# Altium PCB node_pcb.PcbDoc
Units mm, origin at the board's own origin, x right, y up, seen from the top; angles counter-clockwise.
Board outline 40 x 90.26 mm, 2 copper layers (Top Layer, Bottom Layer); 50 components, 52 nets, 195 pads, 49 vias.
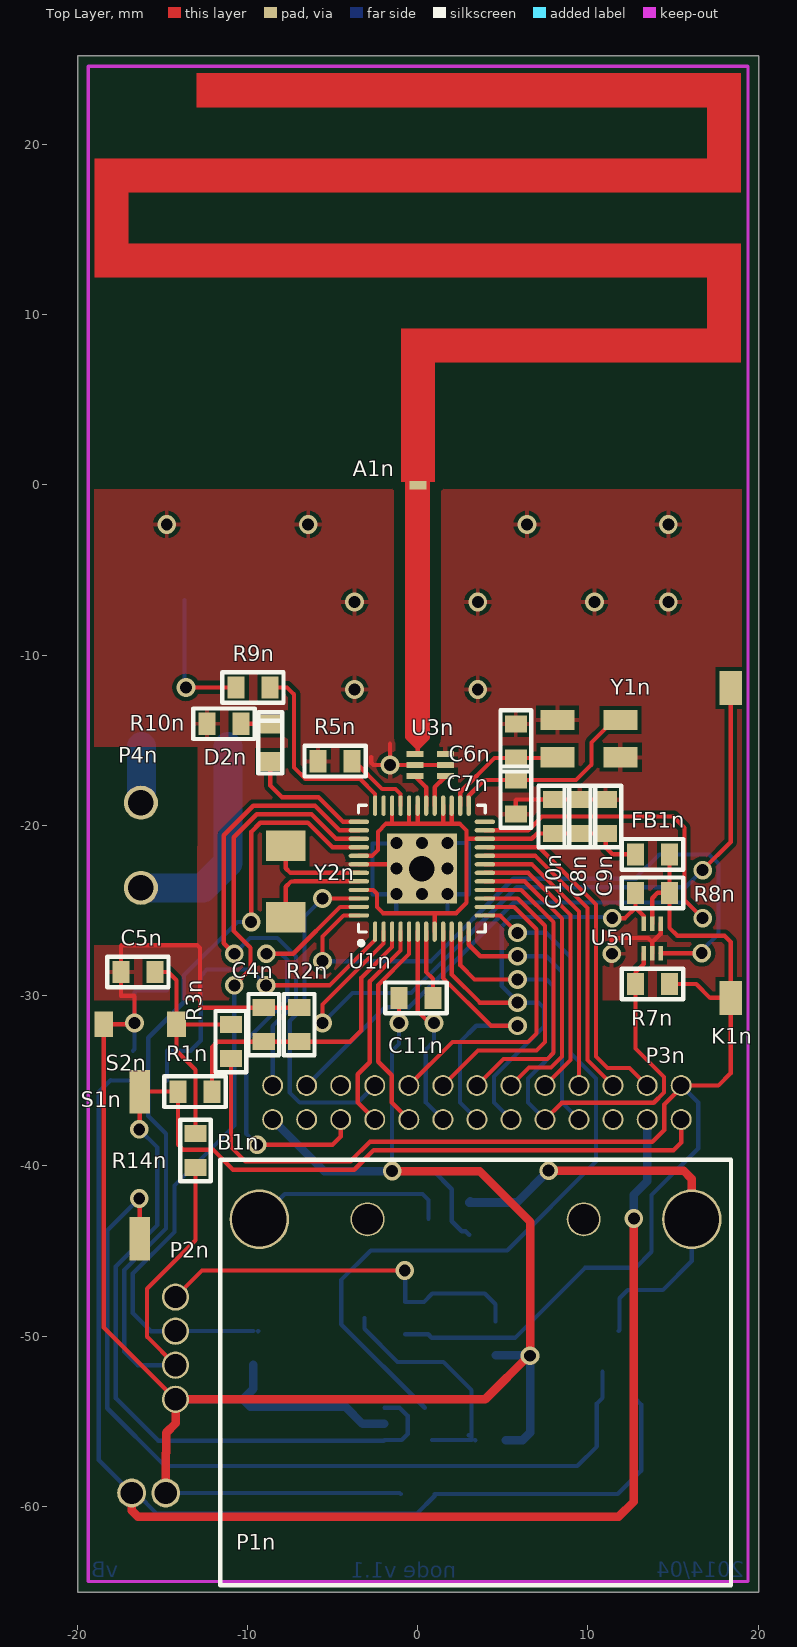
[diagram p0: Top Layer view]
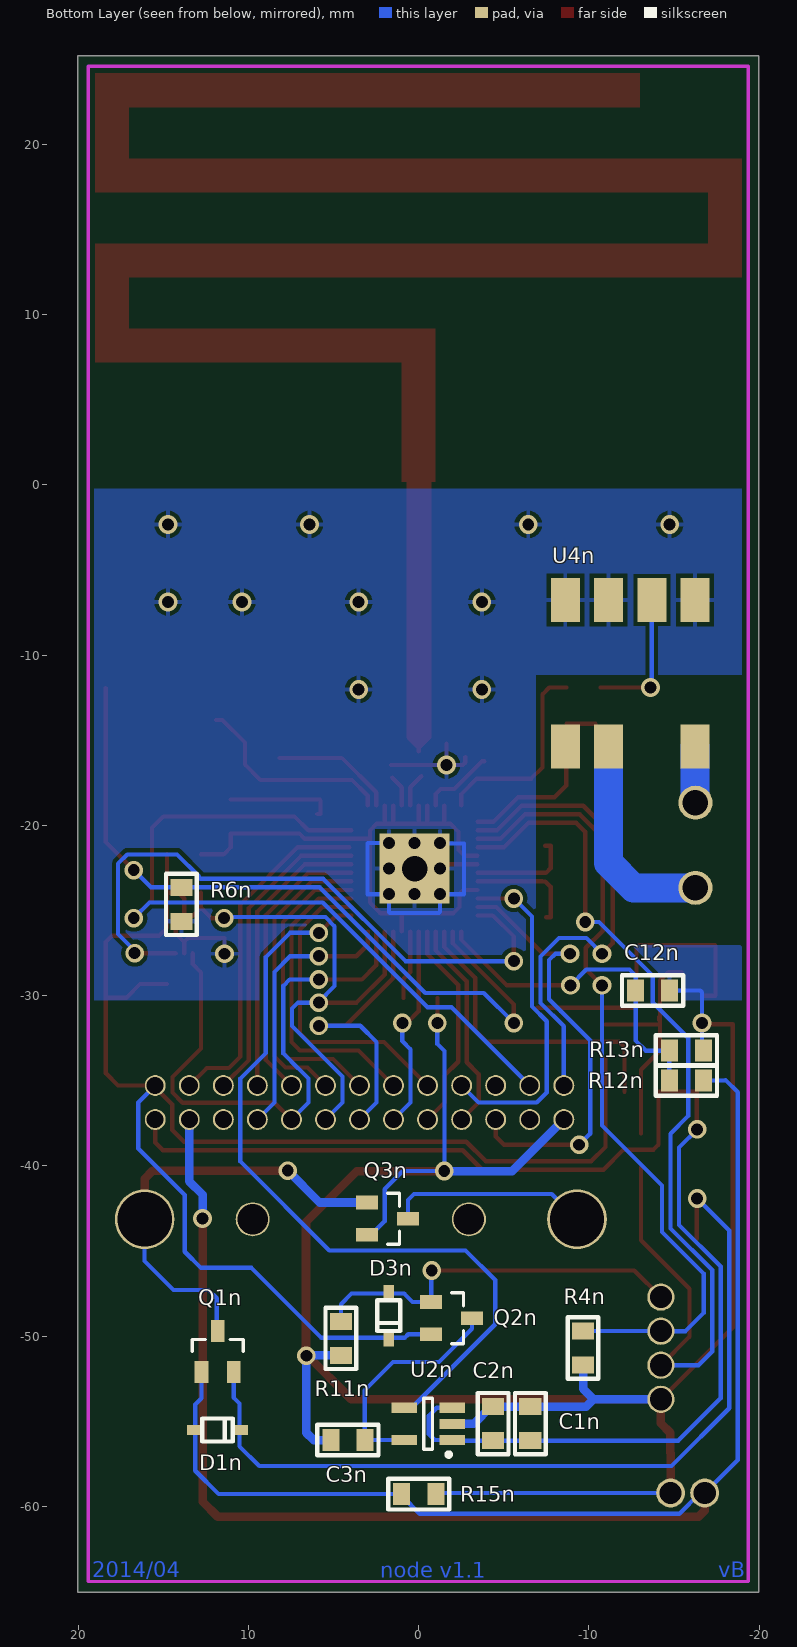
[diagram p1: Bottom Layer view, seen from below]
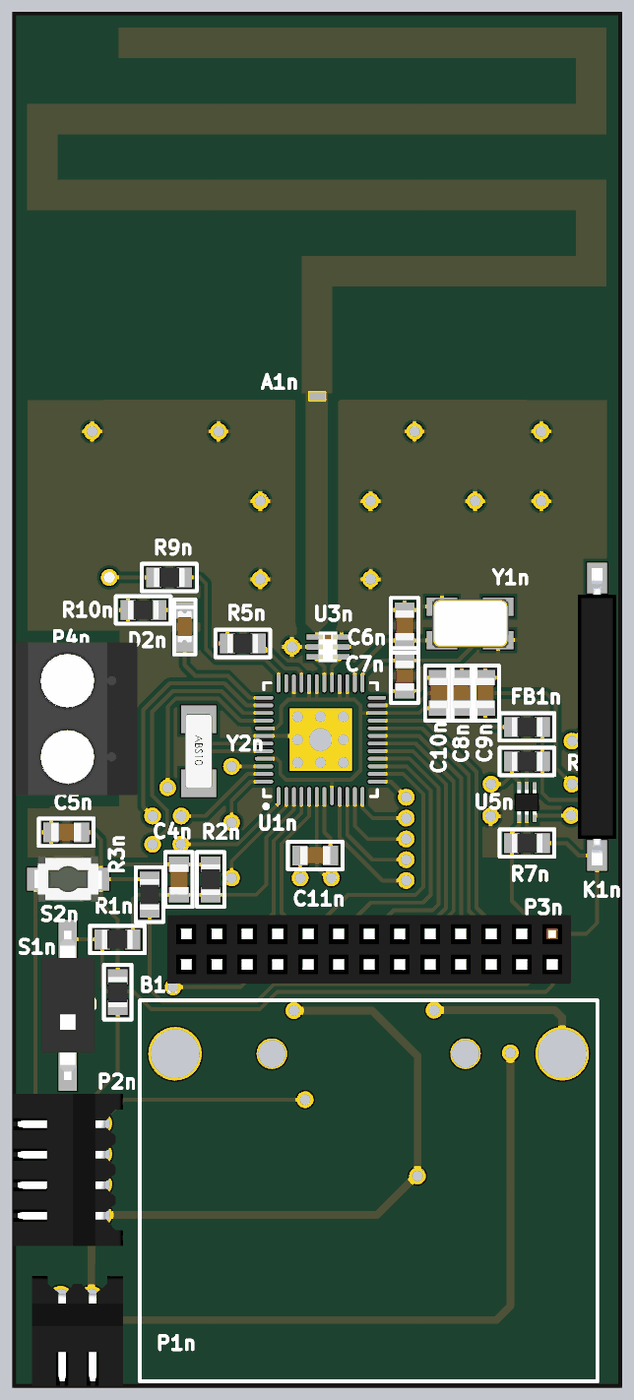
[diagram p2: 3D render of the assembled board from above, using the file's embedded part models]
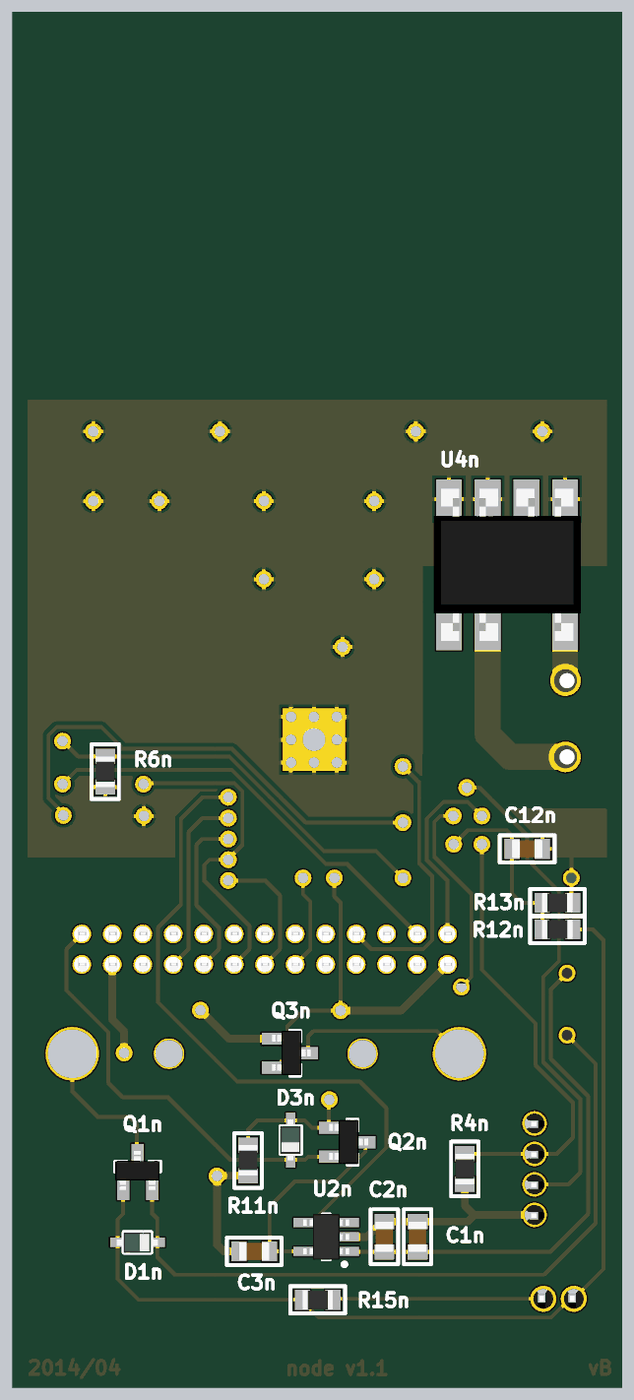
[diagram p3: 3D render of the assembled board from below, using the file's embedded part models]

## Layer stack, top to bottom
Top Layer: signal copper 0.0356
Dielectric: dielectric 0.32, FR-4, Dk 4.8
Bottom Layer: signal copper 0.0356

## Board outline
-19.971,-65.052 20.034,-65.052 20.034,25.212 -19.971,25.212

## Design rules (kind name [scope] priority, off if disabled: settings)
Clearance Clearance_RF_CC430 [Inpoly vs InNet('NetA1n_1')] p1: gap=0.65
Clearance Clearance_1 [All] p2: gap=0.25
Clearance Clearance_polygon [Inpoly] p3: gap=0.5
HoleSize [All] p1: absolutevalues=TRUE maxlimit=10 minlimit=0.7 maxpercent=80.000 minpercent=20.000
MinimumSolderMaskSliver [All] p1 off: minsoldermaskwidth=0.05
PolygonConnect [All] p1: connectstyle=Relief reliefconductorwidth=0.254 reliefentries=4 polygonreliefangle="90 Angle"
RoutingVias [All] p1: holewidth=0.7 width=1.1 viastyle="Through Hole" minholewidth=0.7 minwidth=1.1 maxholewidth=8 maxwidth=10
SilkToSilkClearance [All] p1 off: silktosilkclearance=0.254
SilkscreenOverComponentPads [All] p1 off: minsilkscreentomaskgap=0.254
SolderMaskExpansion [All] p1: expansion=0.102
Width [All] p1: maxlimit=2 minlimit=0.25 preferedwidth=0.25
24 further rules are at their usual default settings.

## Classes and differential pairs
component class node_sch: B1n C1n C2n C3n C4n C5n C6n C7n C8n C9n C10n C11n C12n D1n D2n D3n FB1n K1n P1n P2n P3n P4n Q1n Q2n Q3n R1n R2n R3n R4n R5n R6n R7n R8n R9n R10n R11n R12n R13n R14n R15n S1n S2n U1n U4n U5n Y1n Y2n

## Components (designator, comment, footprint, x,y, rotation, side; value= is the part's Value field where it differs from the comment)
A1n "PCB Antenna" TI_Monopole_PCB_Antenna 0.022,-0.011 r0 top
B1n "Coin Cell" COIN_CELL_HOLDER_JBH24 3.404,-43.14 r180 top
C1n "NA" 0805_CAP -6.553,-55.143 r270 bottom
C2n "1uF" 0805_CAP -4.369,-55.143 r270 bottom
C3n "1uF" 0805_CAP 4.166,-56.109 r180 bottom
C4n "100nF" 0805_CAP -9.042,-31.71 r270 top
C5n "2.2nF" 0805_CAP -16.434,-28.611 r0 top
C6n "10pF" 0805_CAP 5.766,-18.339 r90 top
C7n "10pF" 0805_CAP 5.766,-15.037 r270 top
C8n "2.2pF" 0805_CAP 9.525,-19.482 r270 top
C9n "100nF" 0805_CAP 11.049,-19.482 r90 top
C10n "1uF" 0805_CAP 8.001,-19.482 r270 top
C11n "470nF" 0805_CAP -0.102,-30.135 r0 top
C12n "100nF" 0805_CAP -13.741,-29.703 r0 bottom
D1n "Schottky" SOD323-F 12.725,-54.839 r270 bottom
D2n "LED" 0805_LED_RED -8.661,-15.149 r90 top
D3n "Schottky" SOD323-F 1.092,-47.904 r0 bottom
FB1n "FerriteBead" 0805_RES 13.792,-21.702 r180 top
K1n "Reed sensor" REED_SENSOR_SMD 18.39,-21.034 r90 top
P1n "External Battery" DF3A-2P-2DS -15.799,-59.218 r0 top
P2n "SBW interface" DF3A-4P-2DS -14.224,-47.712 r270 top
P3n "Node-header" FH26p2pitch_thru-hole 3.48,-36.283 r180 top
P4n "CTB5202/2" ScrewTerminal2p5pitch_thru-hole -16.256,-21.169 r270 top
Q1n "P-MOS" SOT23 11.811,-50.902 r90 bottom
Q2n "P-MOS" SOT23 -1.93,-48.946 r180 bottom
Q3n "N-MOS" SOT23 1.829,-43.104 r180 bottom
R1n "6K2" 0805_RES -13.081,-35.647 r180 top
R2n "3K6" 0805_RES -6.96,-31.71 r270 top
R3n "33K" 0805_RES -10.973,-32.7 r270 top
R4n "33K" 0805_RES -9.652,-50.698 r90 bottom
R5n "56K (1%)" 0805_RES -4.851,-16.231 r180 top
R6n "10K" 0805_RES 13.945,-24.638 r90 bottom
R7n "1K" 0805_RES 13.792,-29.322 r0 top
R8n "1K" 0805_RES 13.792,-23.963 r0 top
R9n "100R" 0805_RES -9.677,-11.898 r180 top
R10n "1R50" 0805_RES -11.379,-14.031 r0 top
R11n "10K" 0805_RES 4.572,-50.14 r90 bottom
R12n "6K2" 0805_RES -15.723,-34.986 r180 bottom
R13n "2K7" 0805_RES -15.723,-33.234 r0 bottom
R14n "330R" 0805_RES -13.056,-39.101 r90 top
R15n "10K" 0805_RES 0,-59.284 r180 bottom
S1n "SW DIP-1" SW_DIP(1way) -16.332,-39.965 r180 top
S2n "SW TACT" SW-TACT -16.307,-31.684 r180 top
U1n "CC430F5137" TI-RGZ48-4100X4100TP_N 0.247,-22.54 r90 top
U2n "TPS780330220" SOT5 -1.956,-56.109 r0 bottom
U3n "0868BM15C0001" JT_Balun 0.737,-16.453 r90 top
U4n "PR39MF51" SSR_SMT_LEAD -16.231,-6.767 r270 bottom
U5n "TMP112" SOT563 13.279,-27.519 r90 top
Y1n "XTAL_RF" xtal_rf 10.058,-14.91 r180 top
Y2n "XTAL" XTAL -7.747,-23.302 r270 top

## Footprints (in the part's own frame and the unit in brackets; to place one, negate y for a bottom-side part, rotate by r counter-clockwise, add the part's x,y. Pads: shape width x height; smd on the part's side, far side on the other; paste and mask are expansions set on the pad)
0805_CAP [mm] "0805_Cap"
  rect 1x1.3 smd: 1(-1,0) 2(1,0)
  silkscreen extent -1.8,-0.9 1.8,0.9, body extent -1,-0.6 1,0.6, height 1.2
0805_LED_RED [mm] "0805 Red LED"
  rect 1.1x1.3 smd: 1(-1.1,0) 2(1.1,0)
  silkscreen extent -1.8,-0.7 1.8,0.7, body extent -1.01,-0.45 1.06,0.46, height 0.85
0805_RES [mm] "0805_Res"
  rect 1x1.3 smd: 1(-1,0) 2(1,0)
  silkscreen extent -1.8,-0.9 1.8,0.9, body extent -1,-0.62 1,0.63, height 0.5
COIN_CELL_HOLDER_JBH24 [mm] "Based on JBH24 Jauch coin cell holder"
  round 3.5 hole 3.2: 1(-12.7,0) 2(12.7,0)
  round 2 hole 1.8: 3(6.35,0) 4(-6.35,0)
  silkscreen extent -15,-3.5 15,21.5
DF3A-2P-2DS [mm] "For power source connection. (DF3A- 2P-2DS)"
  round 1.7 hole 1.3: 1(-1,0) 2(1,0)
  body extent -2.9,-5.7 3.1,1.5, height 4.9
DF3A-4P-2DS [mm] "Based on Hirose DF3A-4P-2DS model."
  round 1.6 hole 1.3: 1(0,0) 2(2,0) 3(4,0) 4(6,0)
  body extent -1.96,-5.68 8.04,1.52, height 5.05
FH26p2pitch_thru-hole [mm] "Node Header; 13x2 Position, 2mm pitch, through-hole"
  round 1.23 hole 1: 1(-12,-1) 2(-12,1) 3(-10,-1) 4(-10,1) 5(-8,-1) 6(-8,1) 7(-6,-1) 8(-6,1) 9(-4,-1) 10(-4,1) 11(-2,-1) 12(-2,1) 13(0,-1) 14(0,1) 15(2,-1) 16(2,1) 17(4,-1) 18(4,1) 19(6,-1) 20(6,1) 21(8,-1) 22(8,1) 23(10,-1) 24(10,1) 25(12,-1) 26(12,1)
  body extent -13.21,-2.24 13.29,2.26, height 4
JT_Balun [mm] "footprint of 0868BM15C0001"
  rect 0.35x1 smd: 1(0.65,0.9) 2(0,0.9) 3(-0.65,0.9) 4(-0.65,-0.9) 5(0,-0.9) 6(0.65,-0.9)
  body extent -1,-0.62 1,0.63, height 0.8
REED_SENSOR_SMD [mm] "Based on MK15-B-2-OE"
  rect 2x1.3 smd: 1(-9.1,0) 2(9.1,0)
  body extent -9.75,-1.25 9.75,1.25, height 2.55
ScrewTerminal2p5pitch_thru-hole [mm] "Based on Camdenboss CTB5202/2 screw terminal model"
  round 2 hole 1.5: 1(-2.5,0) 2(2.5,0)
  body extent -5,-3.5 5,4.5, height 10
SOD323-F [mm] "SOD323-F (SC-90)"
  rect 0.6x1 smd: 1(0.675,2.2) 2(0.675,-0.4)
  silkscreen extent 0,0 1.35,1.8, body extent 0.02,-0.46 1.37,2.24, height 0.79
SOT5 [mm]
  rect 1.5x0.6 smd: 1(0,0) 2(0,-0.95) 3(0,-1.9) 4(2.8,-1.9) 5(2.8,0)
  silkscreen extent 0.08,-2.45 1.65,0.97, body extent -0.1,-2.45 2.9,0.55, height 1.45
SOT23 [mm]
  rect 1.3x0.8 smd: 1(-1.2,0.95) 2(-1.2,-0.95) 3(1.2,0)
  silkscreen extent 0,-1.5 0.7,1.5, body extent -1.17,-1.44 1.38,1.48, height 0.94
SOT563 [mm] "PCB footprint of the SOT563 package. Designed in Sub1GHz_WSN project for tmp112"
  rect 0.85x0.25 smd mask+0.05: 1(0,0) 2(0,-0.5) 3(0,-1) 4(1.75,-1) 5(1.75,-0.5) 6(1.75,0)
  body extent 0.06,-1.3 1.69,0.3, height 0.58
SSR_SMT_LEAD [mm] "Footprint of Sharp SMT Solid StateRelays (SMT Gullwing Lead-form))(model no.:PR39MF51YIPF)"
  rect 2.6x1.7 smd: 1(0,0) 2(0,-2.54) 3(0,-5.08) 4(0,-7.62) 5(8.6,-7.62) 6(8.6,-5.08) 8(8.6,0)
  body extent -0.7,-8.64 9.3,1.02, height 4
SW-TACT [mm] "Based on TL1015AF160QG(E Switch)"
  rect 1.1x1.5 smd: 1(-2.137,0) 2(2.137,0)
  body extent -2.2,-1.5 2.2,1.5, height 1.8
SW_DIP(1way) [mm] "Footprint based on A6SN-1104 (OMRON)"
  rect 1.2x2.55 smd: 1(0,4.325) 2(0,-4.325)
  body extent -1.74,-4.9 1.74,4.9, height 4.4
TI-RGZ48-4100X4100TP_N [mm] "QFN, 48-Leads, Body 7x7mm, Pitch 0.5mm, Thermal Pad 4.1x4.1mm, IPC Medium Density"
  oval 1.2x0.25 smd mask+0.1: 1(-3.7,2.75) 2(-3.7,2.25) 3(-3.7,1.75) 4(-3.7,1.25) 5(-3.7,0.75) 6(-3.7,0.25) 7(-3.7,-0.25) 8(-3.7,-0.75) 9(-3.7,-1.25) 10(-3.7,-1.75) 11(-3.7,-2.25) 12(-3.7,-2.75)
  oval 0.25x1.2 smd mask+0.1: 13(-2.75,-3.7) 14(-2.25,-3.7) 15(-1.75,-3.7) 16(-1.25,-3.7) 17(-0.75,-3.7) 18(-0.25,-3.7) 19(0.25,-3.7) 20(0.75,-3.7) 21(1.25,-3.7) 22(1.75,-3.7) 23(2.25,-3.7) 24(2.75,-3.7) 37(2.75,3.7) 38(2.25,3.7) 39(1.75,3.7) 40(1.25,3.7) 41(0.75,3.7) 42(0.25,3.7) 43(-0.25,3.7) 44(-0.75,3.7) 45(-1.25,3.7) 46(-1.75,3.7) 47(-2.25,3.7) 48(-2.75,3.7)
  oval 1.2x0.25 smd paste+0 mask+0.1: 25(3.7,-2.75) 26(3.7,-2.25) 27(3.7,-1.75) 28(3.7,-1.25) 29(3.7,-0.75) 30(3.7,-0.25) 31(3.7,0.25) 32(3.7,0.75) 33(3.7,1.25) 34(3.7,1.75) 35(3.7,2.25) 36(3.7,2.75)
  rect 4.1x4.1 hole 1.5: 49(0,0)
  silkscreen extent -4.5,-3.72 3.72,3.73, body extent -3.58,-3.57 3.57,3.58, height 1
TI_Monopole_PCB_Antenna [mm] "Based Texas Instruments Monopole PCB antenna Design Note(dn024)"
  rect 1x0.5 smd: 1(0,0)
  Top Layer region: -19.016,12.192 -17.016,12.192 -17.016,19.192 -19.016,19.192
  Top Layer region: -19.016,12.192 18.984,12.192 18.984,14.192 -19.016,14.192
  Top Layer region: -13.016,22.192 18.984,22.192 18.984,24.192 -13.016,24.192
  Top Layer region: -19.016,17.192 18.984,17.192 18.984,19.192 -19.016,19.192
  Top Layer region: 0.984,0.192 0.984,9.192 -1.016,9.192 -1.016,0.192
  Top Layer region: 16.984,17.192 18.984,17.192 18.984,24.192 16.984,24.192
  Top Layer region: 0.475,7.192 18.984,7.192 18.984,9.192 0.475,9.192
  Top Layer region: 16.984,7.192 18.984,7.192 18.984,14.192 16.984,14.192
XTAL [mm] "Based on NXZ32.768KAE125F-KAB3"
  rect 1.8x2.3 smd: 1(-2.1,0) 2(2.1,0)
  body extent -2.45,-0.9 2.45,0.9, height 1
xtal_rf [mm] "Based on TXC - 7B-26.000MEEQ-T"
  rect 2x1.2 smd: 1(-1.85,-1.1) 2(1.85,-1.1) 3(1.85,1.1) 4(-1.85,1.1)
  body extent -2.53,-1.6 2.47,1.6, height 1

## Part data
A1n: library part PCB-Antenna, "TI Monopole PCB Antenna at 868MHz operating frequency"
B1n: library part Coin_Cell, "Represents a 24,5mm diameter coin cell battery (holder)"
C1n C2n C3n C4n C5n C6n C7n C8n C10n C12n: library part Capacitor, "Capacitor"
C9n C11n: library part CAP, "Capacitor"
D1n D3n: "NXP - 1PS76SB10, SCHOTTKY RECT 30V 0.2A SOD323"
D2n: "Typical GaAs LED"
FB1n: "Ferrite Bead"
K1n: library part Reed-Sensor, "Reed sensor for proximity sensing"
P1n: library part ExtBatConnector, "Simple 2 trhu-hole connection for extra batteries"
P2n: library part SBW-interface, "4 pole connector for debugging and programming"
P3n: "Female Header of the node pi 13x2 GPIO connector"
P4n: "2 Pole Screw Terminal"
Q1n Q2n: "irlml6401, P CH, -12V, 4A, SOT23"
Q3n: "FDV301N, N CH, 25V, 0.22A, SOT23"
R1n R2n R3n R4n R5n R6n R7n R8n R9n R12n R13n: library part RES, "Resistor"
R10n R11n R14n R15n: library part Resistor, "Resistor"
S1n: "DIP Switch, 1 Position"
S2n: library part SW-TACT, "Low profile, miniature tact switch"
U1n: library part CC430F5137IRGZR, "20 MHz MSP430 SoC with RF Core with 32 KB Flash, 4096 B SRAM and 30 GPIOs, -40 to 85 degC, 48-pin QFN (RGZ), Green (RoHS & no Sb/Br)"
U2n: "LDO with 2.2V fix output"
U3n: "868MHz Impedance Matched/Balun/BPF Integrated Component for T.I. CC110X, CC430, etc."
U4n: "PR39MF51 SSR, 1.2A"
U5n: "Temp sensor (serial interface, 0.5 C resolution, low supply voltage)"
Y1n Y2n: "Crystal Oscillator"

## Via types
v1: diameter 1.1, hole 0.7, Top Layer to Bottom Layer, 49 vias

## Nets (pads, with @x,y where several pads share a name; then routed paths per layer and width w, separated by ;. In a path a pad name is that pad's centre, name@x,y a point inside that pad or via, vN(x,y) a via of type N, cw(c..) or ccw(c..) an arc to the next point about the centre after c; other vN are vias at no path point)
GND: C1n.1 C2n.1 C3n.1 C4n.1 C5n.1 C6n.1 C7n.1 C8n.1 C9n.2 C10n.1 C11n.1 C12n.1 P1n.2 P2n.4 P3n.26 Q3n.2 R2n.1 R4n.1 R5n.2 R6n.1 R10n.1 R11n.1 R13n.1 R15n.2 S2n.2 U1n.42 U1n.49 U2n.2 U3n.2 U3n.5 U3n.6 U4n.1 U4n.3 U4n.4 U5n.2 U5n.4 Y1n.2 Y1n.4 | length 198
  Top Layer w0.25: P2n.4 -18.444,-49.492 S2n.2 -16.713,-31.684 v1(-16.637,-31.608) -16.637,-30.033 -16.662,-30.008 -17.434,-30.008 C5n.1 -17.434,-27.071 -17.399,-27.036 -12.954,-27.036 -12.786,-27.205 -12.786,-30.71 C4n.1 R2n.1 ; U1n.42 U1n.49@-0.003,-22.29 ; -2.726,-15.985 -2.726,-16.326 -2.599,-16.453 ; -2.593,-16.459 v1(-1.626,-16.459) ; -1.626,-15.208 v1(-1.626,-16.459) ; v1@-1.102,-31.599 C11n.1 ; U3n.2@-0.17,-16.459 v1(-1.626,-16.459) ; U3n.2 U3n.5 ; C6n.1@5.96,-19.339 C6n.1 5.766,-18.523 5.807,-18.482 C10n.1 C8n.1 C9n.2 ; v1(11.405,-27.544) 11.405,-26.619 13.538,-26.619 13.779,-26.861 ; U5n.2 13.779,-26.861 ; U5n.4 14.279,-26.361 13.779,-26.861
  Top Layer w0.5: P1n.2 -14.799,-56.881 ; -14.773,-56.856 -14.773,-55.678 -14.224,-55.129 P2n.4 3.965,-53.712 6.622,-51.054 6.622,-43.3 3.632,-40.31 v1(-1.499,-40.31)
  Bottom Layer w0.25: R13n.1 -16.637,-33.148 v1(-16.637,-31.608) -16.637,-29.805 -16.535,-29.703 C12n.1 ; P1n.2@-14.692,-59.325 P1n.2 -1.066,-59.218 R15n.2 ; v1@-1.51,-40.298 -1.51,-33.259 -1.092,-32.841 v1(-1.092,-31.608) ; v1(-1.499,-40.31) 0.94,-40.31 2.004,-41.374 2.004,-43.253 2.591,-43.84 2.815,-43.84 Q3n.2 ; U1n.49 -1.223,-21.07 -2.655,-21.07 -2.655,-24.04 v1(-1.253,-24.04) -1.253,-25.078 -1.185,-25.146 1.702,-25.146 1.747,-25.101 v1(1.747,-24.04) 3.011,-24.04 3.011,-21.069 2.982,-21.04 v1(1.747,-21.04) ; R11n.1 R11n.1@4.632,-51.2 ; v1@6.588,-51.14 v1(6.604,-51.156)
  Bottom Layer w0.5: P2n.4 -10.271,-53.712 ; R4n.1 -9.652,-53.093 -10.271,-53.712 ; P3n.26 -5.494,-40.31 v1(-1.499,-40.31) ; U2n.2 -3.236,-55.159 -4.251,-54.143 C2n.1 C1n.1 -9.839,-54.143 -10.271,-53.712 ; R11n.1 v1@6.588,-51.14 ; C3n.1 6.172,-56.109 6.604,-55.677 v1(6.604,-51.156)
  other v1: 0.247,-24.04 -1.253,-22.54 1.747,-22.54 -1.253,-21.04 0.247,-21.04 -3.708,-12.014 3.531,-12.014 -3.708,-6.883 3.531,-6.883 10.389,-6.883 14.725,-6.883 -14.739,-2.322 -6.433,-2.322 6.419,-2.322 14.725,-2.322
NetA1n_1: A1n.1 U3n.1 | length 18
  Top Layer w0.25: U3n.1@-0.003,-15.643 -0.003,-15.44
  Top Layer w0.265: -0.61,-14.326 -0.61,-14.834 -0.003,-15.44 0.584,-14.852 0.584,-14.326
  Top Layer w1.47: -0.007,-14.554 -0.007,0.483
NetB1n_2: B1n.2 Q3n.3 | length 11.8
  Bottom Layer w0.25: B1n.2 -7.813,-41.656 0.279,-41.656 0.629,-42.005 Q3n.3
NetC3n_2: C3n.2 Q2n.3 U2n.5 | length 13.8
  Bottom Layer w0.25: Q2n.3 -3.13,-49.575 -1.186,-51.519 1.507,-51.519 3.166,-53.178 C3n.2 U2n.5 ; C3n.2@2.997,-55.829 C3n.2@3.089,-55.829 ; C3n.2@3.369,-56.109 C3n.2@3.378,-56.118
NetC4n_2: C4n.2 R1n.1 R2n.2 U1n.3 | length 18.4
  Top Layer w0.25: R1n.1 -12.081,-33.021 -11.77,-32.71 C4n.2 R2n.2 -3.972,-32.71 -3.319,-32.057 -3.319,-28.958 -1.503,-27.141 U1n.3
NetC5n_2: C5n.2 R3n.1 R14n.2 S2n.1 | length 14.3
  Top Layer w0.25: C5n.2 -14.656,-28.611 -14.169,-29.097 S2n.1 ; S2n.1@-14.119,-31.434 S2n.1@-14.119,-31.253 ; R14n.2 -13.056,-34.351 -14.169,-33.238 S2n.1 ; R3n.1 -14.153,-31.7 S2n.1
NetC6n_2: C6n.2 U1n.25 Y1n.1 | length 12.1
  Top Layer w0.25: U1n.25 2.997,-18.263 3.921,-17.339 C6n.2 9.306,-17.339 10.211,-16.434 10.211,-15.138 11.539,-13.81 Y1n.1
NetC7n_2: C7n.2 U1n.26 Y1n.3 | length 7.3
  Top Layer w0.25: U1n.26 2.497,-18.056 4.516,-16.037 C7n.2 Y1n.3@8.181,-16.037
NetC8n_2: C8n.2 C9n.1 C10n.2 FB1n.2 U1n.8 U1n.22 U1n.27 U1n.28 U1n.31 U1n.32 U1n.34 U1n.41 U1n.45 | length 36.9
  Top Layer w0.25: U1n.45 -2.611,-23.79 -2.388,-24.014 -2.388,-24.801 -2.032,-25.157 0.997,-25.157 ; U1n.41 -2.679,-21.79 -2.337,-21.448 -2.337,-20.381 -1.854,-19.899 2.464,-19.899 2.87,-20.305 2.87,-24.548 2.261,-25.157 0.997,-25.157 ; -1.503,-19.818 U1n.34 ; -0.503,-19.894 U1n.32 ; -0.003,-19.845 U1n.31 ; U1n.8 0.997,-25.157 ; 1.497,-19.872 U1n.28 ; 1.997,-19.858 U1n.27 ; 2.873,-20.79 U1n.22 6.702,-20.79 7.01,-20.482 C10n.2 C8n.2 C9n.1 11.049,-21.296 11.455,-21.702 FB1n.2
NetC11n_2: C11n.2 U1n.7 | length 4.1
  Top Layer w0.25: U1n.7 0.497,-28.611 0.898,-29.012 C11n.2
NetC12n_2: C12n.2 R12n.1 R13n.2 U1n.1 | length 20.2
  Top Layer w0.25: v1(-8.915,-29.398) -5.174,-29.398 -2.503,-26.727 U1n.1
  Bottom Layer w0.25: R12n.1 R13n.2 -13.335,-33.234 -12.741,-32.64 C12n.2 -12.741,-28.83 -12.385,-28.473 -9.84,-28.473 v1(-8.915,-29.398)
NetD1n_1: D1n.1 Q1n.2 S1n.1 | length 50.6
  Top Layer w0.25: S1n.1 v1@-16.332,-41.946
  Bottom Layer w0.25: v1(-16.358,-41.921) -18.237,-43.8 -18.237,-54.24 -14.844,-57.633 9.373,-57.633 10.525,-56.48 D1n.1 10.525,-53.965 10.861,-53.63 Q1n.2
NetD2n_1: D2n.1 U1n.37 | length 7.6
  Top Layer w0.25: D2n.1@-8.577,-16.249 D2n.1 -8.661,-17.662 -7.976,-18.348 -5.83,-18.348 -4.388,-19.79 U1n.37
NetD2n_2: D2n.2 R10n.2 | length 1.7
  Top Layer w0.25: R10n.2@-10.362,-14.049 R10n.2 D2n.2@-8.679,-14.031
NetK1n_2: K1n.2 R6n.2 U1n.2 | length 44.3
  Top Layer w0.25: v1(-5.588,-31.608) -5.588,-30.519 -2.003,-26.934 U1n.2 ; v1(16.739,-22.631) 18.39,-20.981 K1n.2
  Bottom Layer w0.25: v1(-5.588,-31.608) -3.823,-29.843 -0.383,-29.843 5.821,-23.638 R6n.2 15.732,-23.638 v1(16.739,-22.631)
NetP2n_2: P2n.2 R4n.2 U1n.39 | length 47.3
  Top Layer w0.25: v1(-10.77,-29.398) -9.815,-28.444 -9.815,-27.191 -10.806,-26.2 -10.806,-20.701 -9.453,-19.348 -6.244,-19.348 -4.802,-20.79 U1n.39
  Bottom Layer w0.25: v1(-10.77,-29.398) -10.77,-37.628 -14.291,-41.149 -14.291,-43.884 -16.737,-46.331 -16.737,-48.652 -15.677,-49.712 P2n.2 -14.211,-49.698 R4n.2 ; R4n.2@-9.386,-49.712 R4n.2@-9.373,-49.698
NetP2n_3: P2n.3 R14n.1 U1n.40 | length 59.1
  Top Layer w0.25: P2n.3@-14.058,-51.712 P2n.3 -15.9,-50.035 -15.9,-47.219 -13.056,-44.374 R14n.1 ; v1(-9.779,-25.679) -9.779,-20.381 -9.246,-19.848 -6.452,-19.848 -5.009,-21.29 U1n.40
  Bottom Layer w0.25: P2n.3 -16.438,-51.712 -17.237,-50.912 -17.237,-46.124 -14.791,-43.677 -14.791,-38.115 -15.826,-37.08 -15.826,-32.474 -13.741,-30.389 -13.741,-28.829 -10.592,-25.679 v1(-9.779,-25.679)
NetP3n_3: P3n.3 U1n.21 | length 20.4
  Top Layer w0.25: U1n.21@4.089,-21.29 7.12,-21.29 10.48,-24.65 10.48,-33.576 11.153,-34.25 12.446,-34.25 P3n.3
NetP3n_5: P3n.5 U1n.20 | length 18.4
  Top Layer w0.25: U1n.20 6.913,-21.79 9.98,-24.857 9.98,-33.783 P3n.5
NetP3n_7: P3n.7 U1n.19 | length 17.2
  Top Layer w0.25: U1n.19 5.821,-22.29 6.706,-22.29 9.48,-25.064 P3n.7
  Bottom Layer w0.25: P3n.7 P3n.7@9.705,-35.057
NetP3n_8: P3n.8 U1n.12 | length 16
  Top Layer w0.25: U1n.12 2.997,-27.011 3.672,-27.686 v1(5.867,-27.686)
  Bottom Layer w0.25: v1(5.867,-27.686) 7.559,-27.686 8.48,-28.607 8.48,-36.283 P3n.8
NetP3n_9: P3n.9 U1n.18 | length 16.8
  Top Layer w0.25: U1n.18 6.498,-22.79 8.98,-25.272 8.98,-33.783 P3n.9 P3n.9@7.371,-35.175
NetP3n_10: P3n.10 R7n.1 U1n.11 U5n.1 | length 33.6
  Top Layer w0.25: U1n.11 2.497,-28.212 3.342,-29.058 v1(5.867,-29.058) ; P3n.10 8.47,-36.293 13.87,-36.293 14.47,-35.693 14.47,-34.78 12.792,-33.103 R7n.1 12.792,-28.635 13.279,-28.148 U5n.1
  Bottom Layer w0.25: v1@5.867,-28.994 v1(5.867,-29.058) 7.584,-29.058 7.954,-29.428 7.954,-33.408 7.079,-34.283 7.065,-34.283 6.48,-34.869 6.48,-36.283 P3n.10
NetP3n_11: P3n.11 U1n.17 | length 17.6
  Top Layer w0.25: U1n.17 5.08,-23.29 ; 5.407,-23.29 5.08,-23.29 ; P3n.11 6.538,-34.224 7.831,-34.224 8.48,-33.576 8.48,-25.479 6.291,-23.29 5.08,-23.29
NetP3n_12: P3n.12 R8n.1 U1n.10 U5n.6 | length 31.7
  Top Layer w0.25: U1n.10 1.997,-28.758 3.654,-30.414 v1(5.867,-30.414) ; v1(11.43,-25.451) 12.184,-25.451 12.792,-24.843 ; R8n.1 R8n.1@12.792,-24.028 ; R8n.1@12.981,-24.028 R8n.1@12.792,-24.028 ; 13.279,-25.33 12.792,-24.843 ; 12.792,-24.843 R8n.1@12.792,-24.028
  Bottom Layer w0.25: P3n.12 4.48,-36.283 4.48,-34.749 7.442,-31.786 7.442,-30.759 7.097,-30.414 v1(5.867,-30.414) 5.867,-30.366 4.942,-29.441 4.942,-25.932 5.484,-25.389 v1@11.216,-25.389
NetP3n_13: P3n.13 U1n.16 | length 17.8
  Top Layer w0.25: P3n.13 5.038,-33.724 7.616,-33.724 7.98,-33.361 7.98,-25.686 6.084,-23.79 4.873,-23.79 4.475,-23.79 U1n.16
NetP3n_14: P3n.14 U1n.9 | length 17
  Top Layer w0.25: U1n.9 1.497,-28.965 4.307,-31.775 v1(5.867,-31.775)
  Bottom Layer w0.25: P3n.14 2.48,-36.283 2.48,-32.735 3.44,-31.775 v1(5.867,-31.775)
NetP3n_15: P3n.15 U1n.15 | length 18.1
  Top Layer w0.25: P3n.15 3.538,-33.224 6.985,-33.224 7.48,-32.73 7.48,-25.893 5.877,-24.29 U1n.15
NetP3n_16: P3n.16 U1n.6 | length 12.2
  Top Layer w0.25: U1n.6 -0.003,-30.914 0.691,-31.608 v1(0.965,-31.608)
  Bottom Layer w0.25: v1(0.965,-31.608) 0.965,-32.672 0.48,-33.158 0.48,-36.283 P3n.16
NetP3n_17: P3n.17 U1n.14 | length 18.5
  Top Layer w0.25: P3n.17 2.038,-32.724 6.473,-32.724 6.98,-32.218 6.98,-26.1 5.67,-24.79 U1n.14
NetP3n_18: P3n.18 U1n.5 | length 12.5
  Top Layer w0.25: P3n.18 -1.52,-36.283 -1.52,-34.682 -2.319,-33.883 -2.319,-29.372 -0.503,-27.555 U1n.5
NetP3n_19: P3n.19 U1n.46 | length 20
  Top Layer w0.25: v1(-5.588,-24.293) -5.585,-24.29 U1n.46
  Bottom Layer w0.25: v1(-5.588,-24.293) -6.655,-25.36 -6.655,-30.637 -7.52,-31.503 -7.52,-35.697 -6.935,-36.283 -3.52,-36.283 P3n.19
NetP3n_20: P3n.20 U1n.4 | length 12.5
  Top Layer w0.25: P3n.20 -3.52,-36.283 -3.52,-34.621 -2.819,-33.92 -2.819,-29.165 -1.003,-27.348 U1n.4
NetP3n_22: P3n.22 U1n.47 | length 26.2
  Top Layer w0.25: v1(-9.423,-38.76) -5.004,-38.76 -4.52,-38.277 P3n.22 ; v1(-8.89,-27.544) -7.308,-27.544 -4.555,-24.79 U1n.47
  Bottom Layer w0.25: v1(-9.423,-38.76) -10.076,-38.108 -10.076,-32.644 -8.346,-30.914 -8.346,-30.902 -7.655,-30.211 -7.655,-27.916 -8.026,-27.544 v1(-8.89,-27.544)
NetP3n_23: P3n.23 U1n.23 | length 46.5
  Top Layer w0.25: U1n.23 6.495,-20.29 7.303,-19.482 15.011,-19.482 15.667,-20.138 15.667,-23.052 15.667,-24.38 v1(16.739,-25.451)
  Bottom Layer w0.25: P3n.23 -1.92,-30.683 -0.517,-30.683 5.641,-24.526 15.813,-24.526 v1(16.739,-25.451) v1@16.739,-25.135
NetP3n_25: P3n.25 U1n.38 | length 29.2
  Top Layer w0.25: v1(-10.77,-27.544) -11.392,-26.922 -11.392,-20.58 -9.66,-18.848 -6.037,-18.848 -4.595,-20.29 U1n.38
  Bottom Layer w0.25: v1(-10.77,-27.544) -9.845,-26.619 -8.244,-26.619 -7.155,-27.709 -7.155,-30.43 -8.52,-31.795 P3n.25 P3n.25@-8.52,-35.405
NetP4n_1: P4n.1 U4n.8 | length 3.3
  Bottom Layer w1.7: P4n.1 -16.231,-18.643 U4n.8
NetP4n_2: P4n.2 U4n.6 | length 12.6
  Bottom Layer w1.7: P4n.2 -12.609,-23.669 -11.151,-22.21 U4n.6
NetR5n_1: R5n.1 U1n.33 | length 4.3
  Top Layer w0.25: R5n.1 -3.723,-16.231 -2.088,-17.865 -1.296,-17.865 -1.003,-18.158 U1n.33
NetR9n_1: R9n.1 U1n.36 | length 12
  Top Layer w0.25: R9n.1 -7.671,-11.898 -7.264,-12.304 -7.264,-16.597 -6.604,-17.257 -3.404,-17.257 -2.503,-18.158 U1n.36
NetR9n_2: R9n.2 U4n.2 | length 8.1
  Top Layer w0.25: v1(-13.614,-11.898) R9n.2
  Bottom Layer w0.25: U4n.2 -13.691,-11.822 v1(-13.614,-11.898)
NetU1n_13: U1n.13 U2n.4 | length 46.1
  Top Layer w0.25: U1n.13 4.843,-25.29 v1(5.867,-26.314)
  Bottom Layer w0.25: U2n.4@0.411,-54.209 -4.496,-49.301 -4.496,-46.711 -2.754,-44.969 5.258,-44.969 10.48,-39.747 10.48,-34.869 8.98,-33.369 8.98,-27.735 7.559,-26.314 v1(5.867,-26.314)
NetU1n_29: U1n.29 U3n.4 | length 1.9
  Top Layer w0.25: U1n.29 0.997,-17.764 U3n.4@1.56,-17.201
NetU1n_30: U1n.30 U3n.3 | length 2
  Top Layer w0.25: U3n.3@-0.148,-17.119 0.497,-17.764 U1n.30
NetU1n_43: U1n.43 Y2n.1 | length 6
  Top Layer w0.25: Y2n.1@-7.434,-21.202 Y2n.1 -7.747,-22.515 -7.468,-22.794 -7.464,-22.79 U1n.43
NetU1n_44: U1n.44 Y2n.2 | length 6.5
  Top Layer w0.25: Y2n.2@-7.485,-25.402 Y2n.2 -7.747,-23.607 -7.434,-23.294 -7.26,-23.294 -7.256,-23.29 U1n.44
NetU1n_48: U1n.48 U5n.3 | length 38.3
  Top Layer w0.25: v1(-5.588,-27.976) -5.588,-26.531 -4.348,-25.29 U1n.48 ; U5n.3 16.677,-27.519 v1(16.688,-27.508)
  Bottom Layer w0.25: v1(-5.588,-27.976) 0.776,-27.976 5.614,-23.138 12.827,-23.138 12.92,-23.045 12.92,-22.983 14.196,-21.706 17.122,-21.706 17.664,-22.248 17.664,-26.375 16.688,-27.351 v1(16.688,-27.508)
VBAT: B1n.1 Q1n.3 Q3n.1 | length 26.4
  Top Layer w0.5: v1(7.696,-40.284) 15.621,-40.284 16.104,-40.767 B1n.1
  Bottom Layer w0.25: Q1n.3 11.862,-49.651 11.862,-47.777 12.344,-47.295 14.402,-47.295 16.104,-45.593 B1n.1 B1n.1@16.434,-43.14
  Bottom Layer w0.5: Q3n.1@3.095,-42.088 Q3n.1 5.826,-42.154 v1(7.696,-40.284)
VDEBUGN: D3n.2 P2n.1 Q2n.1 R11n.2 | length 22.7
  Top Layer w0.25: P2n.1 -12.664,-46.152 v1(-0.762,-46.152)
  Bottom Layer w0.25: v1@-0.73,-46.183 Q2n.1 0.366,-47.996 0.857,-47.504 D3n.2 3.943,-47.504 4.572,-48.133 R11n.2
VEXTBAT: D1n.2 P1n.1 P3n.4 Q1n.1 R12n.2 R15n.1 | length 118
  Top Layer w0.5: P1n.1 -16.799,-60.25 -16.434,-60.615 11.804,-60.615 12.7,-59.719 v1(12.7,-43.089)
  Bottom Layer w0.25: R12n.2 -18.001,-34.986 -18.026,-34.961 -18.737,-35.672 -18.737,-57.28 P1n.1 -16.531,-59.218 -15.306,-60.443 -0.06,-60.443 1,-59.383 R15n.1 11.754,-59.284 13.125,-57.912 D1n.2 13.125,-54.019 12.761,-53.655 Q1n.1
  Bottom Layer w0.5: v1(12.7,-43.089) 12.7,-41.692 13.48,-40.912 P3n.4
VREG: D3n.1 FB1n.1 K1n.1 P3n.1 Q2n.2 R3n.2 R7n.2 R8n.2 U5n.5 | length 88.5
  Top Layer w0.25: R3n.2 -10.973,-38.887 -10.135,-39.726 -3.937,-39.726 -2.794,-38.583 13.785,-38.583 14.48,-37.888 14.48,-36.39 15.48,-35.39 P3n.1 17.661,-35.283 18.39,-34.555 K1n.1 ; U5n.5 13.779,-24.28 14.097,-23.963 R8n.2 ; R7n.2 16.368,-29.322 17.18,-30.134 K1n.1 ; FB1n.1 R8n.2@14.792,-23.963 ; R8n.2 14.792,-26.019 15.255,-26.482 18.023,-26.482 18.39,-26.848 K1n.1
  Bottom Layer w0.25: Q2n.2 0.62,-49.896 0.828,-50.104 D3n.1 5.72,-50.104 9.83,-45.994 12.792,-45.994 13.741,-45.045 13.741,-41.717 16.48,-38.979 16.48,-36.283 P3n.1
VUNREG: C1n.2 C2n.2 P3n.2 R1n.2 S1n.2 U2n.1 U2n.3 | length 78
  Top Layer w0.25: v1@-16.332,-37.831 S1n.2 R1n.2@-14.088,-35.64 ; R1n.2 -14.081,-38.757 -13.787,-39.05 -12.029,-39.05 -10.854,-40.226 -3.73,-40.226 -2.587,-39.083 15.03,-39.083 15.48,-38.633 P3n.2
  Bottom Layer w0.25: v1(-16.358,-37.857) -15.291,-38.923 -15.291,-43.47 -17.737,-45.916 -17.737,-53.647 -15.241,-56.143 C1n.2 C2n.2 -1.991,-56.143 U2n.1 -0.94,-56.109 -0.584,-55.753 -0.584,-54.686 -1.062,-54.209 U2n.3
pads on no net: B1n.3 B1n.4 P3n.6 P3n.21 P3n.24 U1n.24 U1n.35 U4n.5

## Polygon pours and split planes (outlines as drawn)
GND on Bottom Layer "GND_BOT" (solid, remove dead copper, pour order 4): -19.344,-0.265 -19.319,-0.239 19.406,-0.239 19.406,-30.262 -19.344,-30.262 -19.38,-27.051 -18.949,-27.051 -6.878,-27.051 -6.883,-11.227 -6.883,-11.151 -19.344,-11.151
GND on Top Layer "GND_TOP" (solid, pour order 2): -19.344,-0.265 -0.33,-0.229 -0.61,-0.229 19.406,-0.265 19.406,-30.262 -19.344,-30.262 -19.395,-27.036 -12.954,-27.036 -12.929,-15.392 -19.344,-15.392

## Keep-outs
Keep-Out Layer:
  lines w0.2: -19.344,-64.415 -19.344,24.585 19.406,24.585 19.406,-64.415 -19.344,-64.415

## Other copper
Bottom Layer:
  text "vB" at -17.584,-64.171 h0.9
  text "2014/04" at 19.17,-64.171 h0.9
  text "node v1.1" at 2.254,-64.196 h0.9

## Silkscreen, mask and mechanical layers (free items; w line width, h text height)
Top Solder:
  lines w0.25: 19.83,-64.915 -19.844,-64.915 -19.844,25.093 19.906,25.093 19.906,-64.915